# Altium PCB PCB2.PcbDoc
Units mm, origin at the board's own origin, x right, y up, seen from the top; angles counter-clockwise.
Board outline 41 x 48.5 mm, 2 copper layers (Top Layer, Bottom Layer); 36 components, 23 nets, 142 pads, 31 vias.
Unrouted connection lines stored in the file: 1.
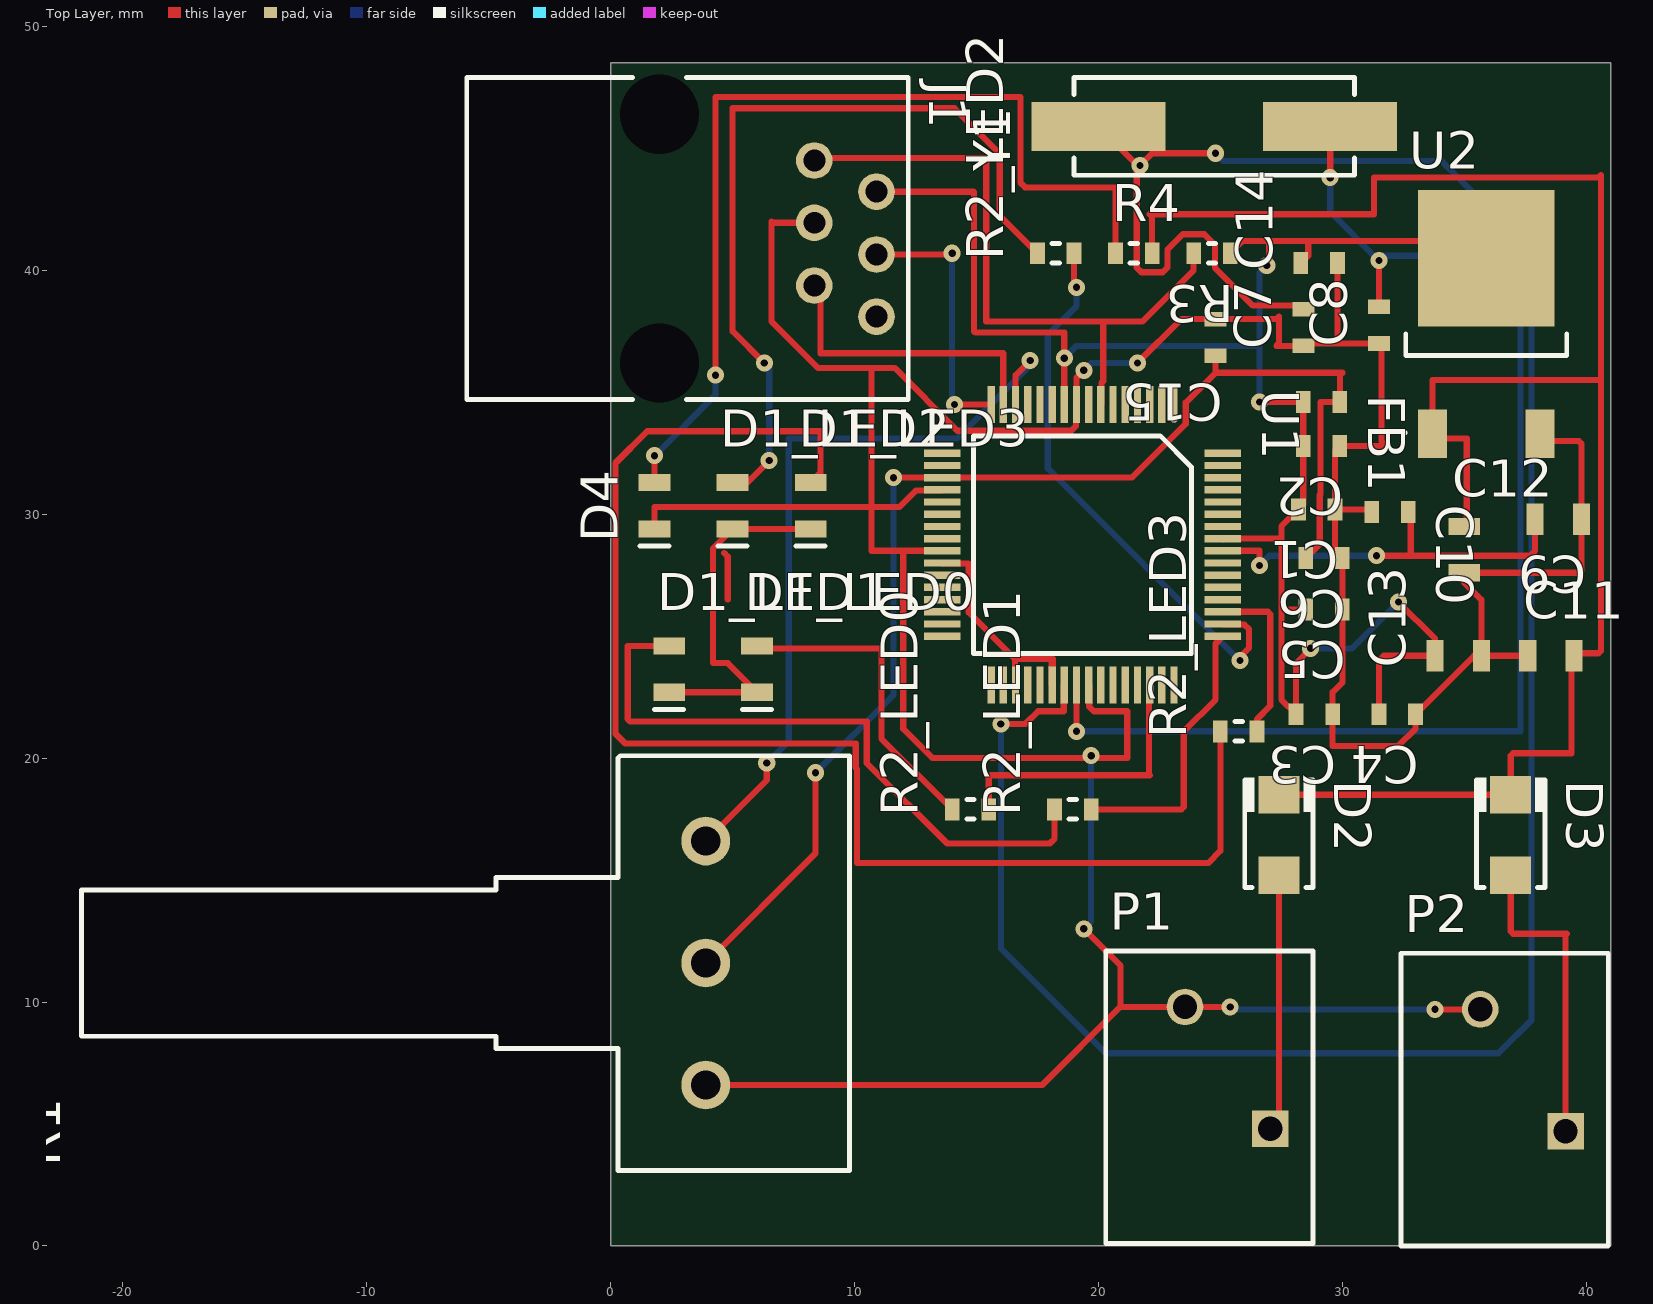
[diagram p0: Top Layer view]
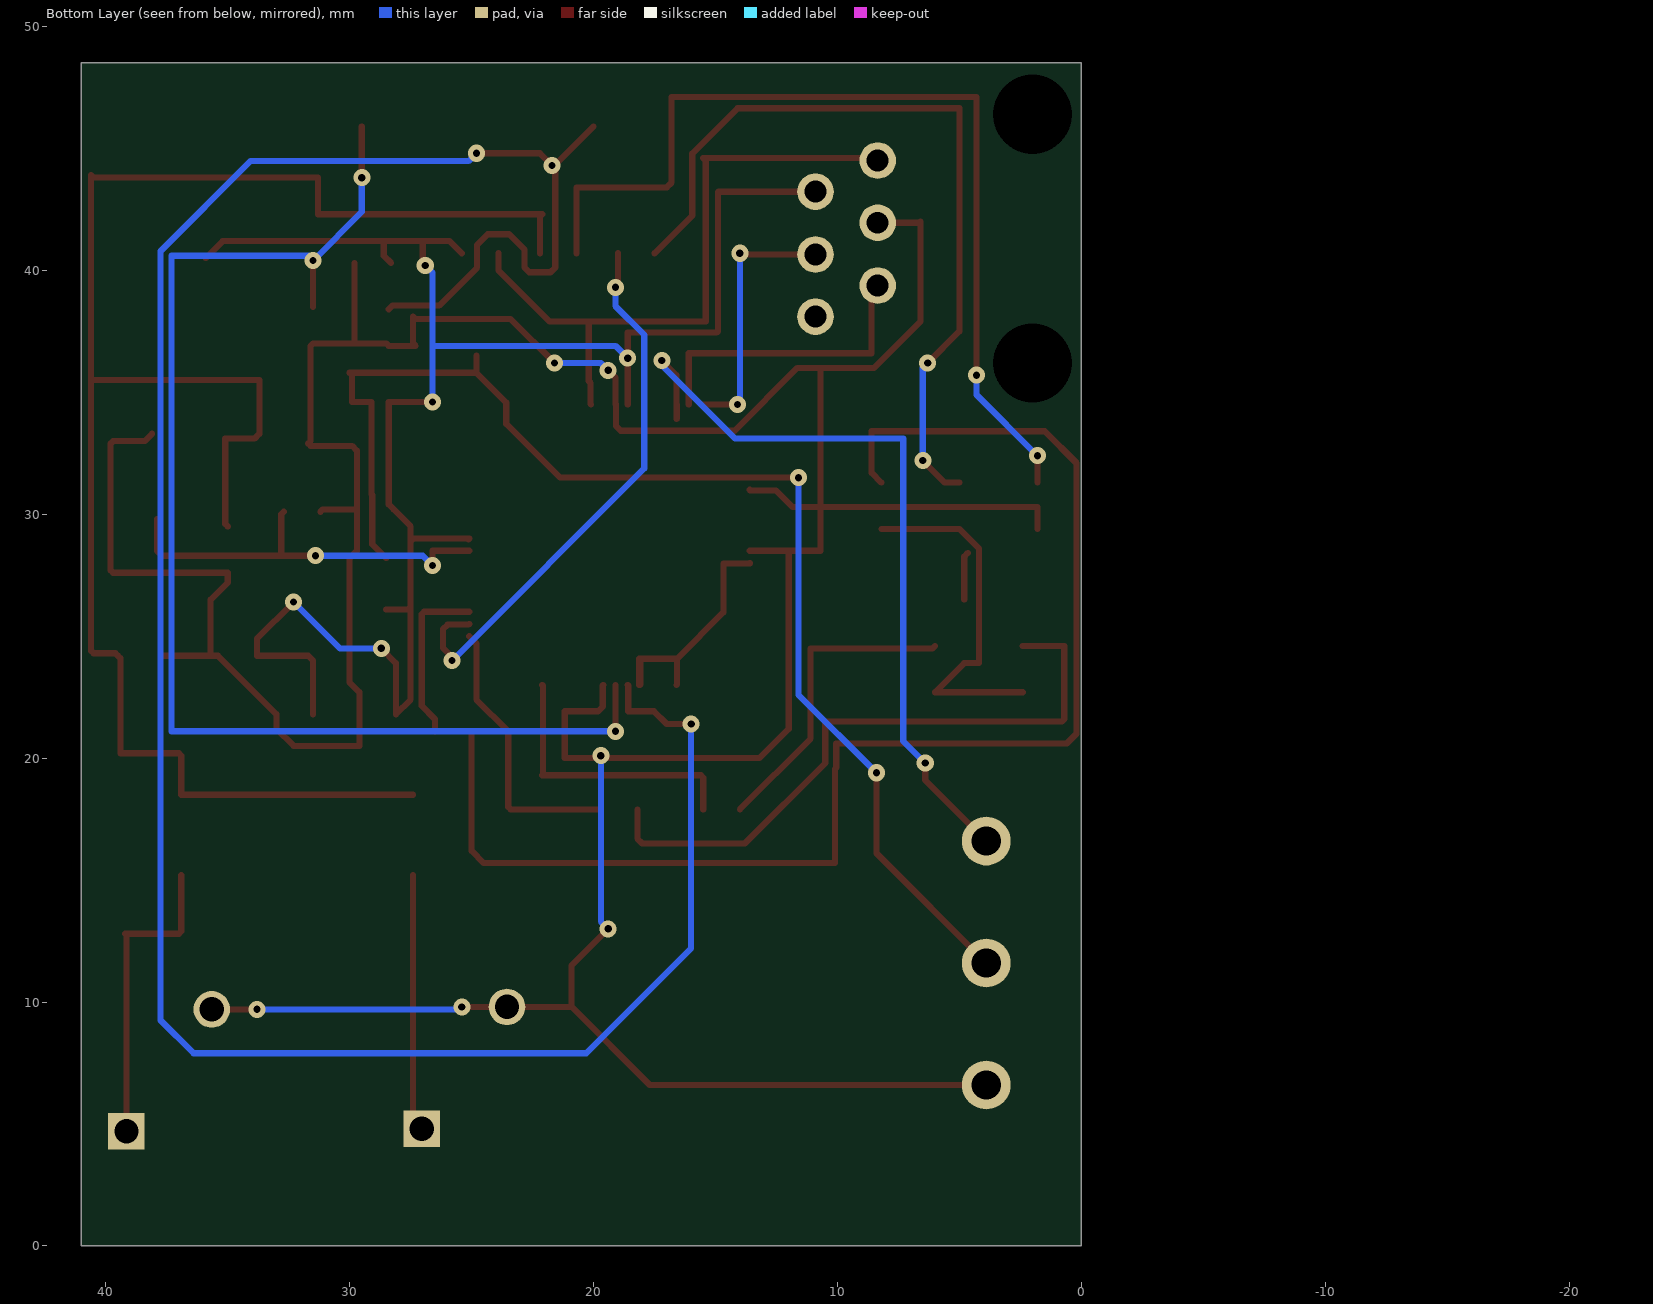
[diagram p1: Bottom Layer view, seen from below]

## Layer stack, top to bottom
Top Solder: solder mask 0.0102, Solder Resist, Dk 3.5
Top Layer: signal copper 0.0356
Dielectric 1: dielectric 0.32, FR-4, Dk 4.8
Bottom Layer: signal copper 0.0356
Bottom Solder: solder mask 0.0102, Solder Resist, Dk 3.5

## Board outline
0,0 41,0 41,48.5 0,48.5

## Design rules (kind name [scope] priority, off if disabled: settings)
Clearance [All] p1: gap=0.2
HoleSize [All] p1: absolutevalues=TRUE maxlimit=5 minlimit=0.3 maxpercent=80.000 minpercent=20.000
PolygonConnect [All] p1: connectstyle=Relief reliefconductorwidth=0.254 reliefentries=4 polygonreliefangle="90 Angle" airgapwidth=0.254
RoutingVias [All] p1: holewidth=0.3 width=0.7 viastyle="Through Hole" minholewidth=0.3 minwidth=0.7 maxholewidth=1 maxwidth=1.2
SolderMaskExpansion [All] p1: expansion=0.102
UnpouredPolygon [All] p1: allowunpoured=FALSE
Width [All] p1: maxlimit=2 minlimit=0.2 preferedwidth=0.2
28 further rules are at their usual default settings.

## Classes and differential pairs
channel class led: LED0 LED1 LED2 LED3
net class LED[0..3]: LED0 LED1 LED2 LED3
component class TP2: R1
component class POWER: C11 C12 C13 C14 C15 D2 D3 D4 FB1 P1 P2 R4 U2
component class PIC: C1 C2 C3 C4 C5 C6 C7 C8 C9 C10 J1 R3 U1 Y1
component class LED3: D1_LED3 R2_LED3
component class LED2: D1_LED2 R2_LED2
component class LED1: D1_LED1 R2_LED1
component class LED0: D1_LED0 R2_LED0

## Components (designator, comment, footprint, x,y, rotation, side; value= is the part's Value field where it differs from the comment)
C1 "100nF" CAPC1608N 29.7,30.2 r180 top
C2 "100nF" CAPC1608N 29.9,32.8 r180 top
C3 "100nF" CAPC1608N 29.6,21.8 r180 top
C4 "100nF" CAPC1608N 33,21.8 r180 top
C5 "100nF" CAPC1608N 30,26.1 r180 top
C6 "100nF" CAPC1608N 30,28.2 r180 top
C7 "20pF" CAPC1608N 28.4,36.9 r90 top
C8 "20pF" CAPC1608N 31.5,37 r90 top
C9 "10uF" CAPC2012N 39.8,29.8 r180 top
C10 "1uF" CAPC1608N 31.2,30.1 r0 top
C11 "10uF" CAPC2012N 37.6,24.2 r0 top
C12 "10uF" CAPC2012N 35,27.6 r90 top
C13 "10uF" CAPC2012N 35.7,24.2 r180 top
C14 "1uF" CAPC1608N 29.8,40.3 r180 top
C15 "100nF" CAPC1608N 24.8,38 r270 top
D1_LED0 "Green LED" "LED 0805" 6,22.7 r90 top (schematic designator D1)
D1_LED1 "Green LED" "LED 0805" 2.4,22.7 r90 top (schematic designator D1)
D1_LED2 "Green LED" "LED 0805" 5,29.4 r90 top (schematic designator D1)
D1_LED3 "Green LED" "LED 0805" 8.2,29.4 r90 top (schematic designator D1)
D2 "GF1A" SMA/DO-214AC_21 27.4,18.5 r270 top
D3 "GF1A" SMA/DO-214AC_21 36.9,18.5 r270 top
D4 "Green LED" "LED 0805" 1.8,29.4 r90 top
FB1 "600r" INDC1608AN 28.4,34.6 r0 top
J1 "Program / Debug" RJ12_90 -5.9,47.9 r270 top
P1 "12V Main" PHOENIX_1985195 20.3,0.1 r0 top
P2 "12V Battery" PHOENIX_1985195 32.4,0 r0 top
R1 "10k" PDB181-K415K-102A2 9.8,3.1 r90 top
R2_LED0 "330r" RESC1608N 15.5,17.9 r180 top (schematic designator R2)
R2_LED1 "330r" RESC1608N 19.7,17.9 r180 top (schematic designator R2)
R2_LED2 "330r" RESC1608N 19,40.7 r180 top (schematic designator R2)
R2_LED3 "330r" RESC1608N 26.5,21.1 r180 top (schematic designator R2)
R3 "4.7k" RESC1608N 25.4,40.7 r180 top
R4 "470r" RESC1608N 20.7,40.7 r0 top
U1 "PIC32MX764F128H-I/PT" QFP50P1200X1200X120-64 23.1,34.5 r270 top
U2 "AP1117" TD03B_N 35.9,40.5 r0 top
Y1 "8MHz" "HC49/4H SMX CRYSTAL" 29.5,45.9 r180 top

## Footprints (in the part's own frame and the unit in brackets; to place one, negate y for a bottom-side part, rotate by r counter-clockwise, add the part's x,y. Pads: shape width x height; smd on the part's side, far side on the other; paste and mask are expansions set on the pad)
CAPC1608N [mm] "0603"
  rect 0.6x0.9 smd: 1(0,0) 2(1.5,0)
CAPC2012N [mm] "0805"
  rect 0.7x1.3 smd: 1(0,0) 2(1.9,0)
"HC49/4H SMX CRYSTAL" [mm] "HC49/4HSMX"
  rect 5.5x2 smd: 1(0,0) 2(9.5,0)
  silkscreen extent -1,-2 10.5,2
INDC1608AN [mm] "0603"
  rect 0.6x0.9 smd: 1(0,0) 2(1.5,0)
"LED 0805" [mm] "0805"
  rect 0.7x1.3 smd: 1(1.9,0) 2(0,0)
  silkscreen extent -0.7,-0.6 -0.7,0.6
PDB181-K415K-102A2 [mm]
  round 2 hole 1.2: 1(3.5,5.9) 2(8.5,5.9) 3(13.5,5.9)
  silkscreen extent 0,0 17,31.5
PHOENIX_1985195 [mm]
  rect 1.5x1.5 hole 1: 1(6.75,4.7)
  round 1.5 hole 1: 2(3.25,9.7)
  silkscreen extent 0,0 8.5,12
QFP50P1200X1200X120-64 [mm]
  oval 1.5x0.3 smd: 1(0,0)
  rect 1.5x0.3 smd: 2(0,-0.5) 3(0,-1) 4(0,-1.5) 5(0,-2) 6(0,-2.5) 7(0,-3) 8(0,-3.5) 9(0,-4) 10(0,-4.5) 11(0,-5) 12(0,-5.5) 13(0,-6) 14(0,-6.5) 15(0,-7) 16(0,-7.5) 33(11.5,-7.5) 34(11.5,-7) 35(11.5,-6.5) 36(11.5,-6) 37(11.5,-5.5) 38(11.5,-5) 39(11.5,-4.5) 40(11.5,-4) 41(11.5,-3.5) 42(11.5,-3) 43(11.5,-2.5) 44(11.5,-2) 45(11.5,-1.5) 46(11.5,-1) 47(11.5,-0.5) 48(11.5,0)
  rect 0.3x1.5 smd: 17(2,-9.5) 18(2.5,-9.5) 19(3,-9.5) 20(3.5,-9.5) 21(4,-9.5) 22(4.5,-9.5) 23(5,-9.5) 24(5.5,-9.5) 25(6,-9.5) 26(6.5,-9.5) 27(7,-9.5) 28(7.5,-9.5) 29(8,-9.5) 30(8.5,-9.5) 31(9,-9.5) 32(9.5,-9.5) 49(9.5,2) 50(9,2) 51(8.5,2) 52(8,2) 53(7.5,2) 54(7,2) 55(6.5,2) 56(6,2) 57(5.5,2) 58(5,2) 59(4.5,2) 60(4,2) 61(3.5,2) 62(3,2) 63(2.5,2) 64(2,2)
  silkscreen extent 1.28,-8.21 10.21,0.72
RESC1608N [mm] "0603"
  rect 0.6x0.9 smd: 1(0,0) 2(1.5,0)
  silkscreen extent 0.6,-0.4 0.9,0.4
RJ12_90 [mm]
  round 1.5 hole 0.9: 1(3.4,14.25) 2(4.675,16.8) 3(5.95,14.25) 4(7.25,16.8) 5(8.525,14.25) 6(9.8,16.8)
  oval 0.75x0.7 hole 3.25 unplated: 13(1.5,7.9) 13(11.7,7.9)
  silkscreen extent 0,0 13.2,18.1
SMA/DO-214AC_21 [mm]
  rect 1.52x1.68 smd: 1(3.3,0) 2(0,0)
  silkscreen extent -0.7,-1.4 3.8,1.4
TD03B_N [mm]
  rect 1.2x2 smd: 1(2.2,-7.2) 3(-2.2,-7.2)
  rect 5.6x5.6 smd: 4(0,0)
  silkscreen extent -3.32,-7.17 3.3,-3.1

## Part data
C1 C2 C3 C4 C5 C6 C7 C8 C9 C10 C11 C12 C13 C14 C15: library part Cap, "Capacitor"
D1_LED0 D1_LED1 D1_LED2 D1_LED3 D4: library part LED2, "Typical RED, GREEN, YELLOW, AMBER GaAs LED"
D2 D3: library part Diode, "Default Diode"
FB1: library part Inductor, "Inductor"
P1 P2: library part "Header 2", "Header, 2-Pin"
R1: library part RPot, "Potentiometer"
R2_LED0 R2_LED1 R2_LED2 R2_LED3 R3 R4: library part Res1, "Resistor"
Y1: library part XTAL, "Crystal Oscillator"

## Via types
v1: diameter 0.7, hole 0.3, Top Layer to Bottom Layer, 31 vias

## Nets (pads, with @x,y where several pads share a name; then routed paths per layer and width w, separated by ;. In a path a pad name is that pad's centre, name@x,y a point inside that pad or via, vN(x,y) a via of type N, cw(c..) or ccw(c..) an arc to the next point about the centre after c; other vN are vias at no path point)
ALIM: D2.1 P1.1 | length 10.5
  Top Layer w0.254: P1.1 27.4,5.15 D2.1
BATTERY: D3.1 P2.1 | length 12.8
  Top Layer w0.254: D3.1 36.9,12.9 37,12.8 39.2,12.8 39.15,12.75 P2.1
GND: C1.1 C2.1 C3.1 C4.1 C5.1 C6.1 C7.1 C8.1 C9.1 C10.1 C11.1 C12.1 C13.1 C14.1 C15.1 D4.2 J1.3 P1.2 P2.2 R1.1 U1.9 U1.20 U1.25 U1.41 U2.1 | length 175.1
  Top Layer w0.254: D4.2 1.8,30.3 10.7,30.3 ; R1.1 17.7,6.6 20.9,9.8 ; J1.3 6.65,41.95 6.6,42 6.6,37.9 8.5,36 10.7,36 ; U1.25 12,28.5 ; U1.20 13.577,30.977 12.523,30.977 11.846,30.3 10.7,30.3 ; v1(19.4,13) 20.9,11.5 20.9,9.8 ; v1(19.4,35.9) 19.1,35.6 U1.9 19.077,34.523 19.077,33.615 18.885,33.423 14.22,33.423 11.643,36 10.7,36 ; U1.41 19.623,22.977 19.623,22.115 19.815,21.923 21.177,21.923 21.177,20 13.2,20 12,21.2 12,28.5 ; v1(21.6,36.2) 23.4,38 C15.1 27.3,38 27.4,38.1 27.4,37 27.3,36.9 C7.1 28.5,37 29.8,37 ; v1(25.4,9.8) P1.2 20.9,9.8 ; C14.1 29.8,37 ; C10.1 31.1,30.2 C1.1 ; v1(33.8,9.7) P2.2 ; C11.1 C13.1 ; U2.1 38.4,33 39.7,33 39.8,32.9 C9.1 39.8,27.7 39.7,27.6 C12.1 35,27.2 35.7,26.5 C13.1 ; 10.7,30.3 10.7,36 ; 10.7,30.3 10.7,28.5 12,28.5 ; C1.1 29.7,32.6 C2.1 31.6,32.8 31.7,32.9 31.6,33 31.6,36.9 C8.1 29.8,37 ; C1.1 29.7,28.5 C6.1 C5.1 30,23.1 29.6,22.7 C3.1 29.6,20.5 32.3,20.5 33,21.2 C4.1 35.4,24.2 C13.1
  Bottom Layer w0.254: v1(19.4,13) 19.7,13.3 v1(19.7,20.1) ; v1(19.4,35.9) 19.7,36.2 v1(21.6,36.2) ; v1(25.4,9.8) 25.5,9.7 v1(33.8,9.7)
LED0: R2_LED0.1 U1.46 | length 11.7
  Top Layer w0.254: R2_LED0.1 15.5,19.2 15.6,19.3 22.1,19.3 22.077,19.323 22.077,22.977 U1.46
LED1: R2_LED1.1 U1.49 | length 11.5
  Top Layer w0.254: R2_LED1.1 23.4,17.9 23.5,18 23.5,21.1 24.8,22.4 24.8,24.7 U1.49
LED2: R2_LED2.1 U1.50 | length 23.1
  Top Layer w0.254: R2_LED2.1 19,39.4 v1(19.1,39.3) ; U1.50 25.123,25.477 25.985,25.477 26.177,25.285 26.177,24.523 25.8,24.146 v1(25.8,24)
  Bottom Layer w0.254: v1(19.1,39.3) 19.1,38.531 17.923,37.354 17.923,31.877 v1(25.8,24)
LED3: R2_LED3.1 U1.51 | length 7
  Top Layer w0.254: U1.51 26.946,26 27.046,25.9 27.046,22.146 26.5,21.6 R2_LED3.1
MCLR: J1.1 R3.2 U1.7 | length 27.4
  Top Layer w0.254: J1.1 8.45,44.6 15.5,44.6 15.4,44.5 15.4,37.9 20.2,37.9 ; U1.7 20.123,34.523 20.123,35.385 20.2,35.462 20.2,37.9 ; R3.2 23.9,40 21.8,37.9 20.2,37.9
NetC9_2: C9.2 C10.2 U1.56 | length 16.8
  Top Layer w0.254: U1.56 26.6,28.5 v1(26.6,27.9) ; v1(31.4,28.3) 32.8,28.3 ; C10.2 32.8,30 32.8,28.3 ; C9.2 37.9,28.5 37.7,28.3 32.8,28.3
  Bottom Layer w0.254: v1(26.6,27.9) 27,28.3 v1(31.4,28.3)
NetD1_LED0_1: D1_LED0.1 R2_LED0.2 | length 12.9
  Top Layer w0.254: D1_LED0.1 6.1,24.5 11.1,24.5 11.1,20.8 R2_LED0.2
NetD1_LED1_1: D1_LED1.1 R2_LED1.2 | length 26.6
  Top Layer w0.254: D1_LED1.1 0.7,24.6 0.7,21.6 0.8,21.5 10.5,21.5 10.5,19.8 13.8,16.5 18,16.5 18.2,16.7 R2_LED1.2
NetD1_LED2_1: D1_LED2.1 R2_LED2.2 | length 33.4
  Top Layer w0.254: D1_LED2.1 5.6,31.3 v1(6.5,32.2) ; v1(6.3,36.2) 5,37.5 5,46.646 14.096,46.646 15.954,44.788 15.954,42.246 R2_LED2.2
  Bottom Layer w0.254: v1(6.3,36.2) 6.5,36 v1(6.5,32.2)
NetD1_LED3_1: D1_LED3.1 R2_LED3.2 | length 57.2
  Top Layer w0.254: D1_LED3.1 8.6,31.7 8.6,33.4 1.5,33.4 0.2,32.1 0.2,21 0.6,20.6 10.046,20.6 10.046,19.612 10.1,19.558 10.1,15.7 24.5,15.7 25,16.2 R2_LED3.2
NetD4_1: D4.1 R4.1 | length 39.5
  Top Layer w0.254: D4.1 v1(1.8,32.4) ; v1(4.3,35.7) 4.3,47.1 16.8,47.1 16.8,43.6 17,43.4 20.7,43.4 R4.1
  Bottom Layer w0.254: v1(1.8,32.4) 4.3,34.9 v1(4.3,35.7)
NetR1_3: R1.3 U1.14 | length 32.4
  Top Layer w0.254: R1.3 6.4,19.1 v1@6.4,19.7 ; U1.14@16.577,34.5 16.577,33.923 16.6,33.9 U1.14 16.6,35.7 v1(17.2,36.3)
  Bottom Layer w0.254: v1(6.4,19.8) 7.3,20.7 7.3,33.1 14.2,33.1 17.2,36.1 v1(17.2,36.3)
PGC: J1.5 U1.15 | length 12.5
  Top Layer w0.254: J1.5 8.6,39.125 8.6,36.6 16.1,36.6 U1.15
PGD: J1.4 U1.16 | length 10.9
  Top Layer w0.254: J1.4 13.95,40.65 v1(14,40.7) ; v1(14.1,34.5) U1.16
  Bottom Layer w0.254: v1(14,40.7) 14,34.6 v1(14.1,34.5)
V3P3: C1.2 C2.2 C3.2 C4.2 C5.2 C13.2 C14.2 FB1.1 J1.2 R3.1 U1.10 U1.26 U1.35 U1.38 U1.57 U2.4 | length 87.4
  Top Layer w0.254: J1.2 14.875,43.225 14.9,43.2 14.9,37.5 14.954,37.446 18.6,37.446 U1.10 ; U1.26 13.6,27.977 14.677,27.977 14.677,25.977 16.577,24.077 ; U1.35 16.577,23.023 16.577,24.077 ; 18.123,24.077 18.123,23 U1.38 18.077,23.023 18.077,24.077 16.577,24.077 ; U1.57@25.123,28.977 U1.57 27.4,29 27.5,28.9 ; R3.1 25.9,41.2 27,41.2 ; v1(26.6,34.6) FB1.1 C2.2 28.4,30.4 C1.2 27.5,29.5 27.5,28.9 ; v1(26.9,40.2) 27,40.3 27,41.2 ; C14.2 28.6,40.6 28.6,41.2 ; C5.2 27.6,26.1 27.5,26.2 ; v1(28.7,24.5) 28.1,23.9 C3.2 27.5,22.4 27.5,26.2 ; C4.2 31.5,24 31.7,24.2 C13.2 33.8,24.9 v1(32.3,26.4) ; U2.4 35.2,41.2 28.6,41.2 ; 27,41.2 28.6,41.2 ; 27.5,26.2 27.5,28.9
  Bottom Layer w0.254: v1(18.6,36.4) 19.1,36.9 26.6,36.9 ; v1(26.6,34.6) 26.6,36.9 ; v1(26.9,40.2) 26.6,39.9 26.6,36.9 ; v1(28.7,24.5) 30.4,24.5 v1(32.3,26.4)
V3P3A: C6.2 C15.2 FB1.2 R1.2 U1.19 | length 53.2
  Top Layer w0.254: R1.2 8.4,16.1 v1(8.4,19.4) ; v1(11.6,31.5) U1.19 21.375,31.5 23.577,33.702 23.577,34.577 24.8,35.8 ; C15.2 24.8,35.8 ; C6.2 29.073,28.773 29.073,30.785 29.1,30.812 29.1,34.6 FB1.2 29.9,35.7 30,35.8 24.8,35.8
  Bottom Layer w0.254: v1(8.4,19.4) 11.6,22.6 v1(11.6,31.5)
V5: C11.2 C12.2 D2.2 D3.2 R4.2 U2.3 | length 74.3
  Top Layer w0.254: R4.2 22.2,42.2 22.1,42.3 31.3,42.3 31.3,43.8 40.5,43.8 40.6,43.9 40.6,35.5 ; D2.2 D3.2 36.9,20.1 37,20.2 39.4,20.2 39.4,24.1 C11.2 39.6,24.3 40.5,24.3 40.6,24.4 40.6,35.5 ; C12.2 35.1,29.6 35.1,33.1 33.9,33.1 U2.3 33.7,35.5 40.6,35.5
VCC: D1_LED0.2 D1_LED1.2 D1_LED2.2 D1_LED3.2 | length 14.9
  Top Layer w0.254: D1_LED1.2 D1_LED0.2 4.8,23.9 4.2,23.9 4.2,28.6 D1_LED2.2 D1_LED3.2
X1: C7.2 U1.39 Y1.2 | length 102.9
  Top Layer w0.254: v1(16,21.4) 17,21.4 17.523,21.923 18.577,21.923 18.577,22.977 U1.39 ; Y1.2 21.573,44.327 21.573,40.115 21.765,39.923 22.635,39.923 22.827,40.115 22.827,40.839 23.465,41.477 24.335,41.477 24.773,41.039 24.773,40.115 26.334,38.554 28.246,38.554 C7.2 ; v1(21.7,44.3) 22.2,44.8 v1(24.8,44.8)
  Bottom Layer w0.254: v1(16,21.4) 16,12.2 20.3,7.9 36.4,7.9 37.754,9.254 37.754,40.788 34.065,44.477 25.123,44.477 v1(24.8,44.8)
X2: C8.2 U1.40 Y1.1 | length 53.7
  Top Layer w0.254: v1(19.1,21.1) U1.40 ; v1(29.5,43.8) Y1.1 ; C8.2 v1(31.5,40.4)
  Bottom Layer w0.254: v1(19.1,21.1) 37.3,21.1 37.3,40.6 31.7,40.6 v1(31.5,40.4) 29.5,42.4 v1(29.5,43.8)
pads on no net: J1.6 J1.13 U1.1 U1.2 U1.3 U1.4 U1.5 U1.6 U1.8 U1.11 U1.12 U1.13 U1.17 U1.18 U1.21 U1.22 U1.23 U1.24 U1.27 U1.28 U1.29 U1.30 U1.31 U1.32 U1.33 U1.34 U1.36 U1.37 U1.42 U1.43 U1.44 U1.45 U1.47 U1.48 U1.52 U1.53 U1.54 U1.55 U1.58 U1.59 U1.60 U1.61 U1.62 U1.63 U1.64
copper on no net: | length 2
  Top Layer w0.254: 4.654,28.412 4.8,28.266 4.8,26.5

## Silkscreen, mask and mechanical layers (free items; w line width, h text height)
board outline:
  the board outline again, w0.2